# EAGLE board Autopilot_remote_receiver (EAGLE 9.5.1)
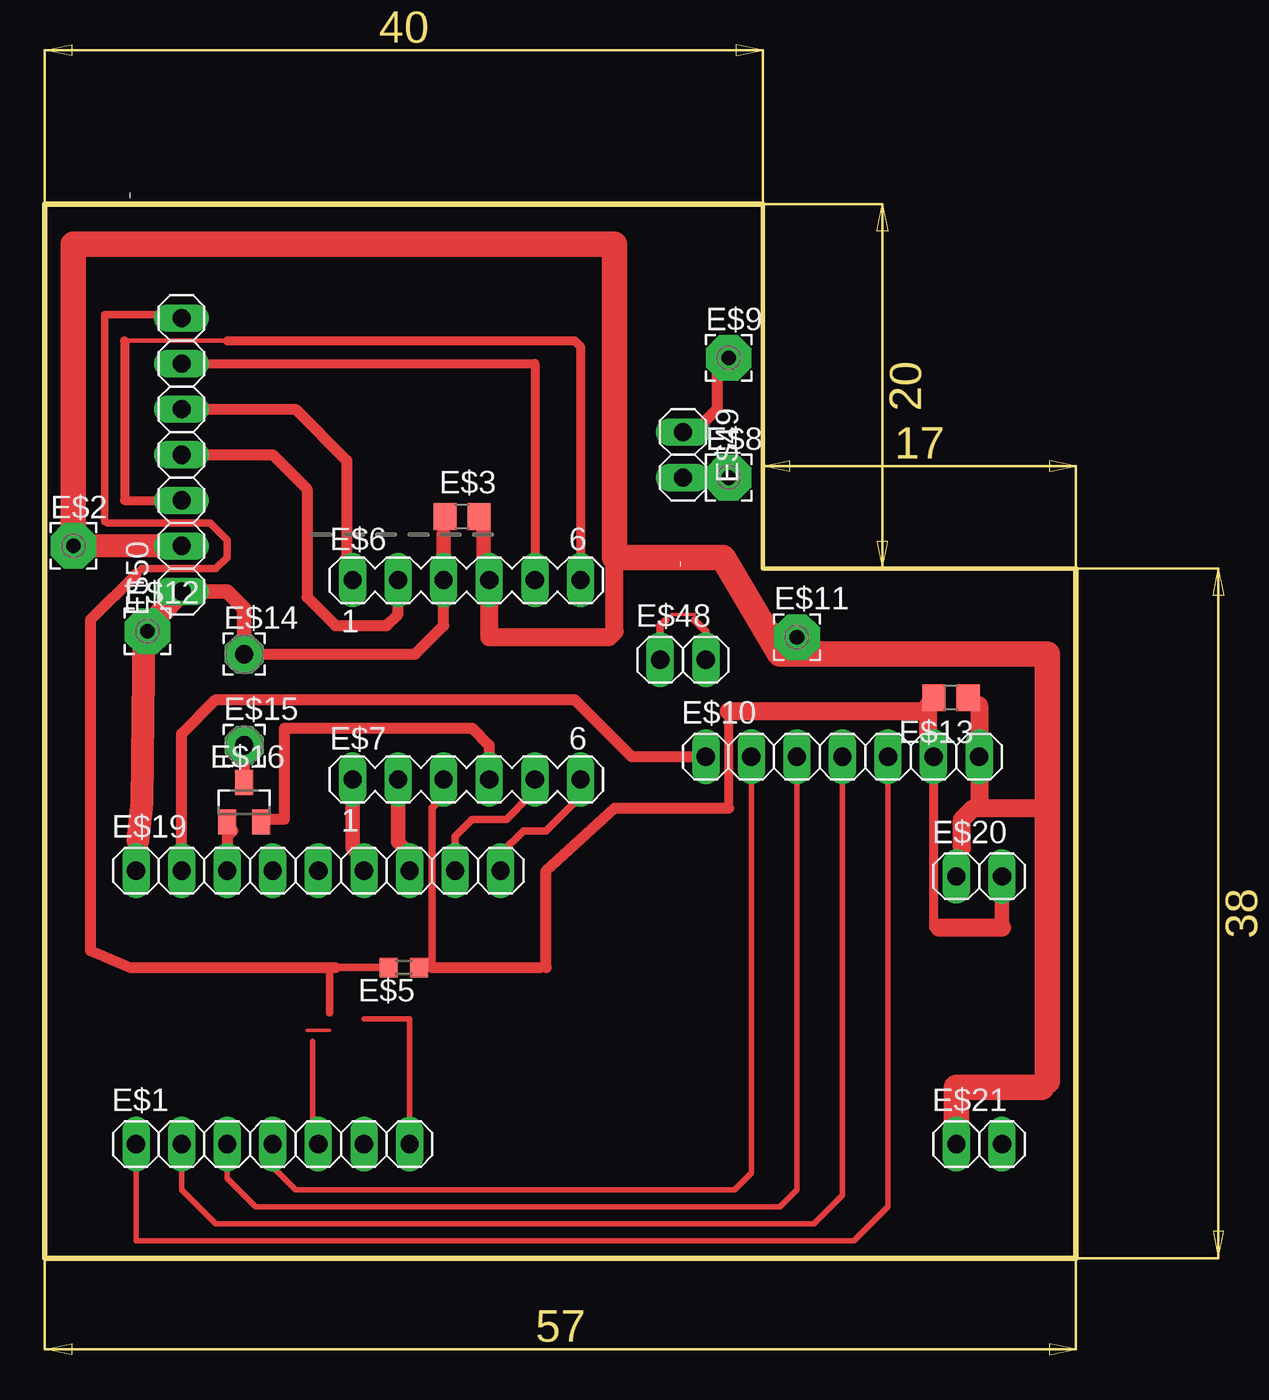
[diagram p0: board, top side]
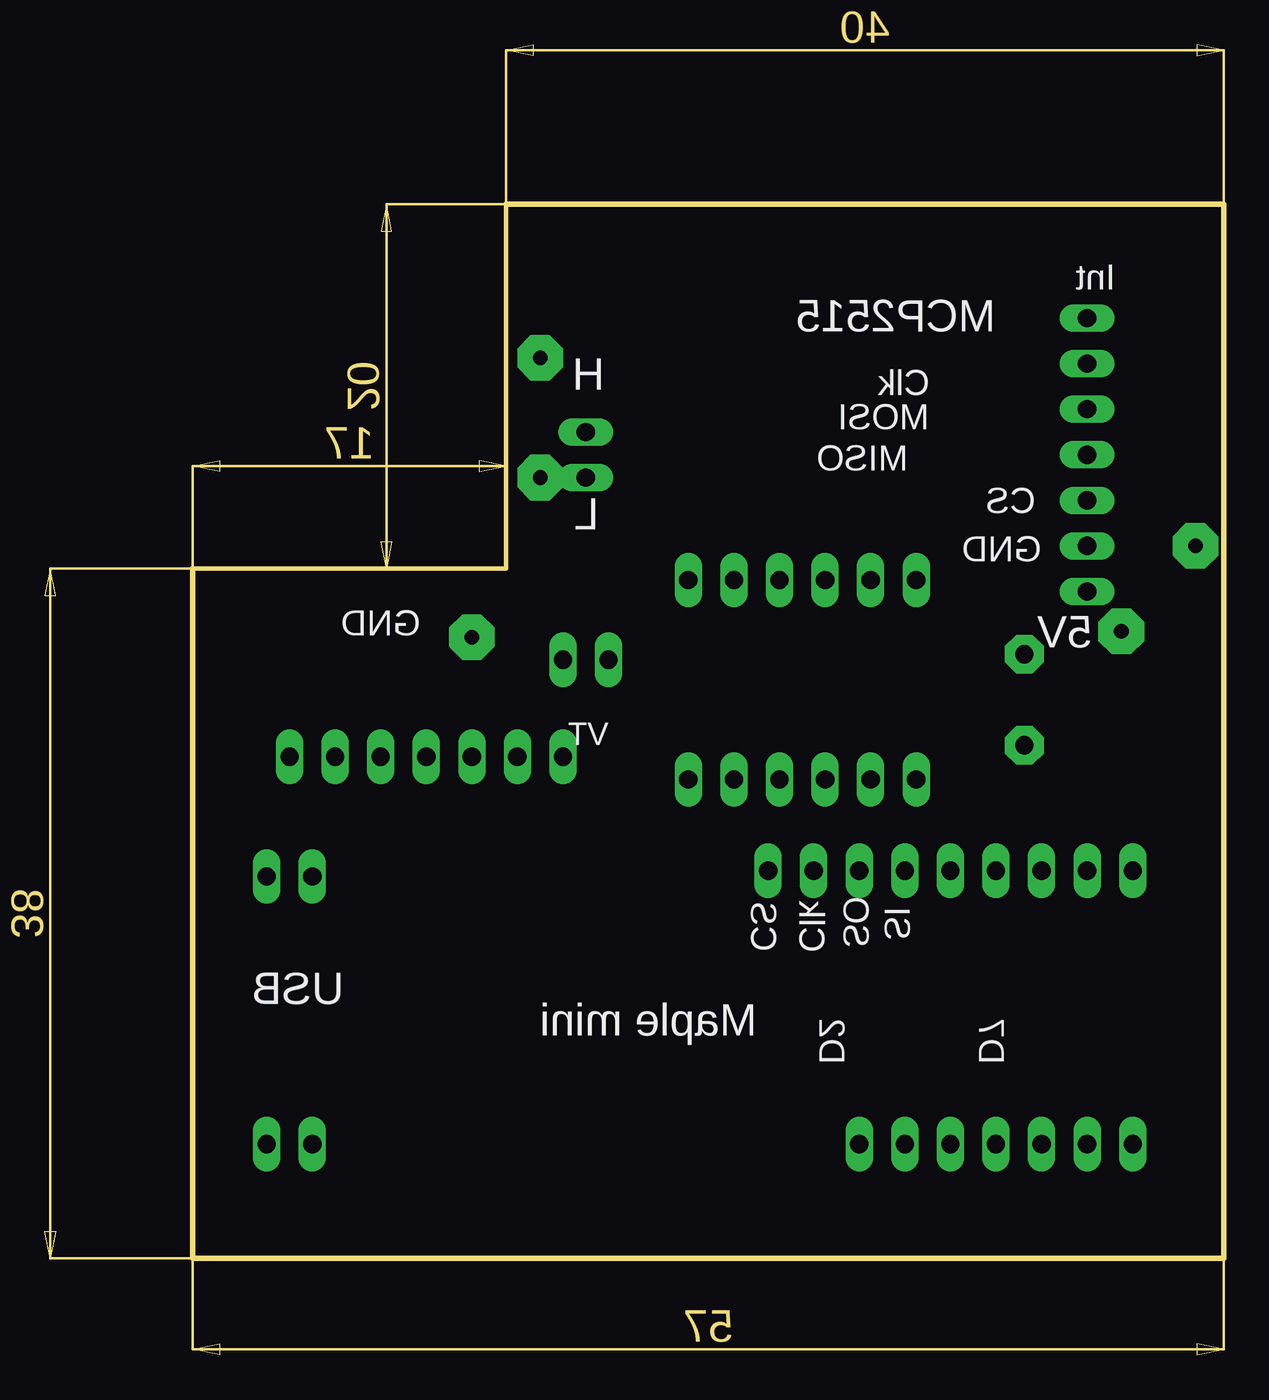
[diagram p1: board, bottom side, seen from below]

Size 57.47 x 58.74 mm. Coordinates in mm from the lower left corner, seen from the top.
Outline: 0,58.74 0,0 57.47,0 57.47,38.42 40,38.42 40,58.74 0,58.74
Copper layers (1*16): Top 0.035mm / dielectric 1.5mm / Bottom 0.035mm
Design rules "default": minimum track width 10mil, minimum drill 24mil, track to track 8mil, track to pad 8mil, pad to pad 8mil, via to via 8mil, smd to smd 8mil, copper to edge 40mil, drill to drill 8mil, minimum pad ring 10mil, minimum via ring 8mil, stop-mask expansion 4mil, vias tented up to drill 0mil, thermal gap 10mil

## Footprints (pad centres in the part's own frame; a part is rotated, then mirrored left to right if it is on the bottom)
1X07 = drill 1.016 long: 1 -7.62,0; 2 -5.08,0; 3 -2.54,0; 4 0,0; 5 2.54,0; 6 5.08,0; 7 7.62,0
2,54/0,8 = drill 0.813 pad 2.54 octagon: 1 0,0
C0805 = smd 1.3 x 1.5: 1 -0.95,0; 2 0.95,0
R0603 = smd 1 x 1.1: 1 -0.85,0; 2 0.85,0
MA06-1 = drill 1.016 long: 1 -6.35,0; 2 -3.81,0; 3 -1.27,0; 4 1.27,0; 5 3.81,0; 6 6.35,0
2,15/1,0 = drill 1.016 pad 2.159 octagon: 1 0,0
SOT23 = smd 1 x 1.4: 1 -0.95,-1.1; 2 0.95,-1.1; 3 0,1.1
1X09 = drill 1.016 long: 1 -10.16,0; 2 -7.62,0; 3 -5.08,0; 4 -2.54,0; 5 0,0; 6 2.54,0; 7 5.08,0; 8 7.62,0; 9 10.16,0
1X02 = drill 1.016 long: 1 -1.27,0; 2 1.27,0

## Placement (x,y rotation side)
E$1  [1X07]  12.7,6.35 0 top
E$2  [2,54/0,8]  1.59,39.69 0 top
E$3  [C0805]  23.25,41.33 0 top
E$5  [R0603]  20,16.19 180 top
E$6  [MA06-1]  23.49,37.78 0 top
E$7  [MA06-1]  23.49,26.67 0 top
E$8  [2,54/0,8]  38.1,43.5 0 top
E$9  [2,54/0,8]  38.1,50.16 0 top
E$10  [1X07]  44.45,27.94 0 top
E$11  [2,54/0,8]  41.91,34.61 0 top
E$12  [2,54/0,8]  5.71,34.93 0 top
E$13  [C0805]  50.5,31.23 180 top
E$14  [2,15/1,0]  11.11,33.66 0 top
E$15  [2,15/1,0]  11.11,28.57 0 top
E$16  [SOT23]  11.11,25.4 0 top
E$19  [1X09]  15.24,21.59 0 top
E$20  [1X02]  52.07,21.27 0 top
E$21  [1X02]  52.07,6.35 0 top
E$48  [1X02]  35.56,33.34 0 top
E$49  [1X02]  35.56,44.77 270 top
E$50  [1X07]  7.62,44.77 90 top

## Library data of the parts
E$1 E$10 E$19-E$21 E$48-E$50 = pinhead
E$2 E$8 E$9 E$11 E$12 E$14 E$15 = wirepad
E$3 E$5 E$13 = smd-ipc
E$6 E$7 = con-lstb
E$16 = linear

## Tracks (layer width: path | path; a pad name or v marks a point on that pad's centre or on a via)
S$1
  Top 1.016: 51.12,22.86 51.12,24.45 51.75,25.08 55.56,25.08
S$2
  Top 1.016: 52.07,27.62 52.07,25.4
S$3
  Top 0.508: 49.53,26.67 49.53,18.41
S$4
  Top 0.61: 11.11,28.89 11.11,26.99
S$5
  Top 0.813: 8.57,37.15 10.16,37.15 11.11,36.2 11.11,34.61
S$6
  Top 0.61: 10.48,23.81 10.16,23.49 10.16,22.54
S$7
  Top 1.016: 24.77,36.51 24.77,34.61 31.43,34.61 31.75,34.93 31.75,39.05 32.07,39.05
S$8
  Top 0.61: 7.62,22.54 7.62,29.21 9.52,31.11 29.53,31.11 32.7,27.94 36.19,27.94
S$9
  Top 0.406: 12.38,24.45 12.06,24.45
  Top 0.61: 24.77,27.62 24.77,28.57 23.81,29.53 13.33,29.53 13.33,24.45 12.38,24.45
S$10
  Top 0.305: 5.08,6.35 5.08,0.95 45.08,0.95 46.99,2.86 46.99,26.99
S$11
  Top 0.305: 44.45,26.67 44.45,3.49 42.86,1.91 9.52,1.91 7.62,3.81 7.62,5.71
S$12
  Top 0.305: 10.16,5.71 10.16,4.45 11.75,2.86 40.96,2.86 41.91,3.81 41.91,26.99
S$13
  Top 0.305: 12.38,5.4 13.97,3.81 38.42,3.81 39.37,4.76 39.37,26.67
S$14
  Top 0.406: 22.23,25.72 21.59,25.08 21.59,16.19
S$15
  Top 1.016: 49.85,18.41 53.34,18.41
S$16
  Top 1.016: 49.21,30.8 49.21,30.48 | 49.21,30.48 49.21,29.21 | 38.1,30.48 49.21,30.48
S$17
  Top 1.016: 52.07,30.8 52.07,29.21
S$18
  Top 0.406: 22.86,22.54 22.86,23.49 23.81,24.45 25.72,24.45 26.99,25.72
S$19
  Top 0.508: 10.16,51.12 29.53,51.12 29.84,50.8 29.84,38.73 29.53,38.42
S$20
  Top 0.508: 38.1,30.16 38.1,25.4
S$21
  Top 0.406: 3.49,40.96 9.21,40.96 10.16,40.01 10.16,39.05 9.52,38.42 5.4,38.42 5.08,38.1 4.76,37.78
  Top 0.61: 2.54,17.14 2.54,35.24 2.54,35.56 5.08,38.1
S$22
  Top 0.61: 37.47,50.16 37.47,47.31 36.19,46.04
S$23
  Top 1.422: 1.59,40.01 1.59,56.52
S$24
  Top 1.27: 7.62,39.69 1.59,39.69
S$25
  Top 1.422: 1.59,56.52 31.75,56.52
S$26
  Top 1.422: 31.75,56.52 31.75,39.05
S$27
  Top 0.508: 27.3,49.85 27.3,38.1
S$28
  Top 0.406: 6.29,52.58 3.35,52.58
S$29
  Top 0.406: 3.35,52.58 3.35,41.05
S$30
  Top 0.508: 4.45,51.12 4.45,42.23
S$31
  Top 0.508: 4.45,42.23 6.67,42.23
S$32
  Top 0.254: 4.45,51.12 10.8,51.12
S$33
  Top 0.508: 8.89,49.85 27.3,49.85
S$34
  Top 0.813: 22.23,40.32 22.23,38.42
S$35
  Top 0.813: 24.45,40.64 24.45,38.73
S$36
  Top 0.61: 8.89,47.31 13.97,47.31 16.83,44.45 16.83,39.05 17.14,38.73
S$37
  Top 0.406: 34.61,35.56 34.29,35.24 34.29,34.29
S$38
  Top 0.406: 36.19,35.56 36.83,34.93 36.83,34.29
S$39
  Top 0.61: 8.57,44.77 12.7,44.77 14.61,42.86 14.61,36.83 16.19,35.24 19.05,35.24 19.68,35.88 19.68,36.83
S$40
  Top 0.2: 34.93,35.88 36.19,35.88
S$41
  Top 0.2: 14.61,12.7 15.88,12.7
S$46
  Top 0.61: 12.06,33.66 20.64,33.66 22.23,35.24 22.23,36.83
S$51
  Top 1.27: 5.5,34.92 5.4,25.4
S$52
  Top 1.27: 5.4,25.4 5.19,23.29
S$55
  Top 0.61: 2.54,17.14 4.76,16.19
S$56
  Top 0.61: 4.76,16.19 16.19,16.19
S$57
  Top 0.406: 15.88,16.19 18.73,16.19
S$58
  Top 0.406: 15.88,16.19 15.88,13.65
S$59
  Top 0.61: 21.59,16.19 27.62,16.19
S$60
  Top 0.813: 17.14,25.4 17.14,22.86
S$61
  Top 0.61: 27.94,16.19 27.94,21.59
S$62
  Top 0.61: 27.94,21.59 31.75,25.08
S$63
  Top 0.61: 31.75,25.08 38.1,25.08
S$64
  Top 0.406: 27.94,23.81 26.67,23.81
S$65
  Top 0.406: 29.53,25.4 27.94,23.81
S$66
  Top 0.406: 26.67,23.81 25.4,22.54
S$67
  Top 1.27: 7.51,37.15 5.5,34.92
S$68
  Top 0.813: 53.34,18.41 53.34,20.32
S$69
  Top 1.422: 50.8,6.99 50.8,9.53
S$70
  Top 1.422: 50.8,9.53 55.56,9.53
S$71
  Top 0.813: 17.14,22.86 17.46,22.54
S$72
  Top 1.422: 55.88,9.84 55.88,33.66
S$73
  Top 1.422: 55.88,33.66 40.96,33.66
S$74
  Top 1.422: 40.96,33.66 37.78,39.05
S$75
  Top 1.422: 31.75,39.05 37.78,39.05
S$76
  Top 0.305: 14.92,12.06 14.92,7.3
S$77
  Top 0.305: 20.32,13.34 20.32,6.99
S$78
  Top 0.305: 17.78,13.34 20.32,13.34
S$83
  Top 0.813: 19.68,25.4 19.68,23.18
S$84
  Top 0.813: 19.68,23.18 20,22.86
S$103
  Bottom 0.254: 8.89,42.23 8.57,42.23

## Text on the board
bPlace: Int | MCP2515 | Clk | H | MOSI | MISO | CS | GND | L | GND | 5V | VT | SI | SO | Clk | CS | USB | Maple mini | D7 | D2
tValues: C2 | LogLevConv | RX480 | C1 | FET